# Altium PCB MX233.PcbDoc
Units mm, origin at the board's own origin, x right, y up, seen from the top; angles counter-clockwise.
Board outline 127 x 101.6 mm, 2 copper layers (Top Layer, Bottom Layer); 46 components, 118 nets, 386 pads, 39 vias.
Unrouted connection lines stored in the file: 56.
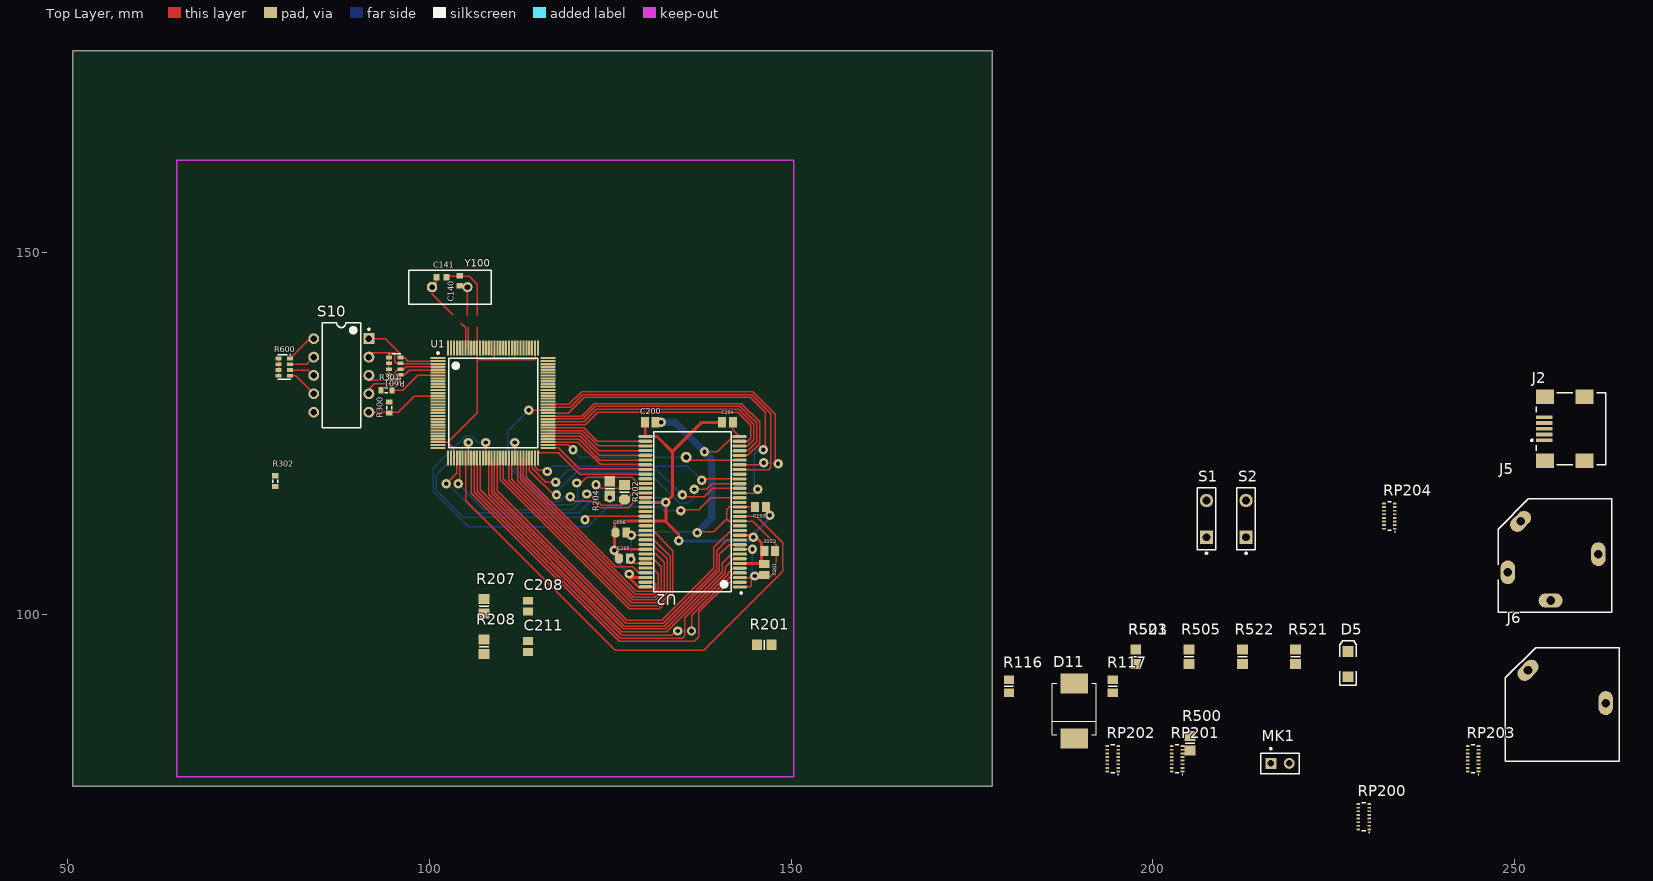
[diagram p0: Top Layer view]
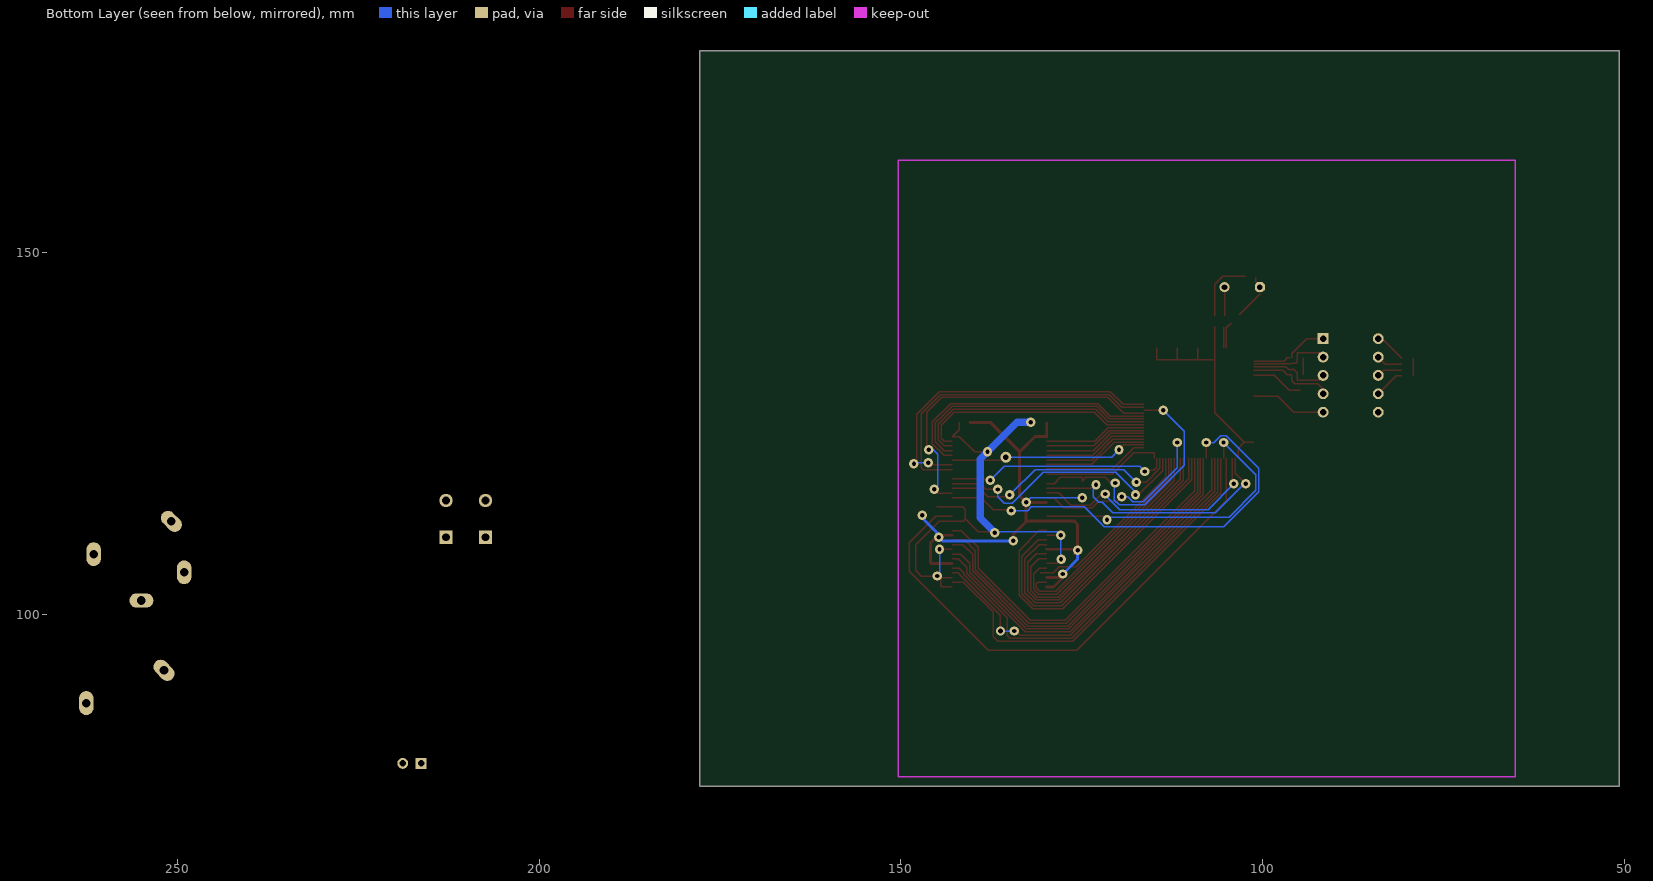
[diagram p1: Bottom Layer view, seen from below]

## Layer stack, top to bottom
Top Layer: signal copper 0.0356
Dielectric: dielectric 0.32, FR-4, Dk 4.8
Bottom Layer: signal copper 0.0356

## Board outline
50.8,76.2 177.8,76.2 177.8,177.8 50.8,177.8

## Design rules (kind name [scope] priority, off if disabled: settings)
Clearance Clearance_1 [(InComponentClass('All Components'))] p1: gap=0.1
Clearance [All] p2: gap=0.2
DiffPairsRouting [All] p1: maxlimit=0.254 minlimit=0.254 mostfreqgap=0.254 maxuncoupledlength=12.7
PolygonConnect [All] p1: connectstyle=Relief reliefconductorwidth=0.254 reliefentries=4 polygonreliefangle="90 Angle"
RoomDefinition MX233 [InComponentClass('MX233')] p1: confinementstyle=ConfineIn formatcopy=TRUE lockcomponents=FALSE outline 178.943,75.184 265.557,75.184 265.557,133.731 178.943,133.731
RoutingVias [All] p1: holewidth=0.6 width=1.3 viastyle="Through Hole" minholewidth=0.6 minwidth=1.3 maxholewidth=0.6 maxwidth=1.3
SilkscreenOverComponentPads [All] p1: minsilkscreentomaskgap=0.254
SolderMaskExpansion [All] p1: expansion=0.102
Width [All] p1: maxlimit=1 minlimit=0.2 preferedwidth=0.2
26 further rules are at their usual default settings.

## Classes and differential pairs
net class DDR_D1: EMI_D01 EMI_D08 EMI_D09 EMI_D10 EMI_D11 EMI_D12 EMI_D13 EMI_D14 EMI_D15 EMI_DQM1 EMI_DQS1
net class DDR_D0: EMI_D00 EMI_D02 EMI_D03 EMI_D04 EMI_D05 EMI_D06 EMI_D07 EMI_DQM0 EMI_DQS0
net class DDR_CTL: EMI_A00 EMI_A01 EMI_A02 EMI_A03 EMI_A04 EMI_A05 EMI_A06 EMI_A07 EMI_A08 EMI_A09 EMI_A10 EMI_A11 EMI_A12 EMI_BA0 EMI_BA1 EMI_CASN EMI_CE0N EMI_CKE EMI_RASN EMI_WEN
net class DDR_CK: DDR_CK_N DDR_CK_P
differential pair DDR_CK: +DDR_CK_P -DDR_CK_N

## Components (designator, comment, footprint, x,y, rotation, side; value= is the part's Value field where it differs from the comment)
C140 "10 pF, NP0" CAPC1608L 104.267,146.05 r90 top
C141 "10 pF, NP0" CAPC1608L 101.727,146.558 r0 top
C200 "10uF, 6.3V, X5R, 20%" CAPC2012L#1 130.556,126.492 r180 top
C201 "0.1uF, 10V, X5R" CAPC2012L#1 146.304,106.172 r90 top
C202 "0.1uF, 10V, X5R" CAPC2012L#1 147.066,108.712 r180 top
C203 "0.1uF, 10V, X5R" CAPC2012L#1 145.796,114.808 r0 top
C204 "0.1uF, 10V, X5R" CAPC2012L#1 141.224,126.492 r180 top
C205 "0.1uF, 10V, X5R" CAPC2012L#2 127,107.696 r180 top
C206 "0.1uF, 10V, X5R" CAPC2012L#2 126.492,111.252 r180 top
C208 "0.1uF, 10V, X5R" CAPC2012L#1 113.665,101.092 r90 top
C211 "0.1uF, 10V, X5R" CAPC2012L#1 113.665,95.504 r90 top
D5 "LED2" DSO-F2/D6.1 226.949,93.091 r90 top
D11 "MBR120VLSF" DIODE_SMC 189.103,86.614 r90 top
J2 "440119-2" 440247 261.874,125.603 r0 top
J5 "Phonejack3 RN 16 Ohm" JACK/6-V4A 255.524,108.077 r0 top
J6 "Video" JACK/6-V2 256.54,87.503 r0 top
MK1 "Mic1" PIN2 216.281,79.375 r0 top
R116 "0.39 ohm, 5%" RESC2012N 180.086,90.043 r90 top
R117 "0.1 ohm, 5%" RESC2012N 194.437,90.043 r90 top
R201 "47K, 5%" RESC2012M#1 146.304,95.758 r180 top
R202 "110 ohm, 1%" RESC2012M#2 127,116.84 r270 top
R204 "47K, 5%" RESC2012M#1 124.968,117.348 r270 top
R207 "1k, 1%" RESC2012M#1 107.569,101.092 r90 top
R208 "1k, 1%" RESC2012M#1 107.569,95.504 r90 top
R300 "47K, 5%" RESC1608L 94.488,128.524 r90 top
R301 "47K, 5%" RESC1608L 94.107,130.937 r0 top
R302 "47K, 5%" RESC1608L 78.74,118.364 r90 top
R500 "100k, 1%" RESC2012M#1 205.105,82.169 r90 top
R501 "10k, 1%" RESC2012M#1 197.612,94.107 r90 top
R505 "2.2K" RESC2012M#1 204.978,94.107 r90 top
R521 "47k, 1%" RESC2012M#1 219.71,94.107 r90 top
R522 "1.2k, 1%" RESC2012M#1 212.344,94.107 r90 top
R523 "1.2k, 1%" RESC2012M#1 197.612,94.107 r90 top
R600 "Res Pack_4SMD" EXB38V#1 80.01,134.112 r270 top
R601 "Res Pack_4SMD" EXB38V#2 95.25,134.239 r270 top
RP200 "22 ohm" EXB2HV 229.108,72.009 r90 top
RP201 "22 ohm" EXB2HV 203.327,80.01 r90 top
RP202 "22 ohm" EXB2HV 194.437,80.01 r90 top
RP203 "22 ohm" EXB2HV 244.221,80.01 r90 top
RP204 "22 ohm" EXB2HV 232.664,113.538 r90 top
S1 "SW-PB" SPST-2 207.391,113.157 r90 top
S2 "SW-PB" SPST-2 212.852,113.157 r90 top
S10 "SW DIP-5" DIP-10/D14.5 87.884,132.969 r180 top
U1 "MX233" TSQFP40P1600X1600-128M 108.839,129.159 r0 top
U2 "HY5DU121622DTP-J (or faster)" "TSOP65P1400-36M - duplicate" 136.398,109.22 r180 top
Y100 "24.0000 MHz (SaRonix-eCera F9 series, 30ppm, 8pF)" HC-49U 102.87,145.161 r0 top

## Footprints (in the part's own frame and the unit in brackets; to place one, negate y for a bottom-side part, rotate by r counter-clockwise, add the part's x,y. Pads: shape width x height; smd on the part's side, far side on the other; paste and mask are expansions set on the pad)
440247 [mm] "Connector; USB2.0, Type B, SM; 5 Position; Right Angle"
  rect 2.3x0.5 smd: 1(-7.85,-1.6) 2(-7.85,-0.8) 3(-7.85,0) 4(-7.85,0.8) 5(-7.85,1.6)
  rect 2.5x2 smd: 6(-7.75,4.45) 7(-2.25,4.45) 8(-7.75,-4.45) 9(-2.25,-4.45)
  round 0.6 hole 0.9 unplated: MH1(-5.25,2.2) MH2(-5.25,-2.2)
  silkscreen extent -9.67,-4.95 0.7,4.95
CAPC1608L [mm] "Chip Capacitor, Body 1.6x0.8mm, IPC High Density"
  rect 0.8x0.9 smd: 1(-0.7,0) 2(0.7,0)
  body extent -0.87,-0.48 0.87,0.48, height 1.3
CAPC2012L#1 [mm] "Chip Capacitor, Body 2.0x1.3mm, IPC High Density"
  rect 1.1x1.4 smd: 1(-0.75,0) 2(0.75,0)
  body extent -1.1,-0.72 1.1,0.72, height 1.4
CAPC2012L#2 [mm] "Chip Capacitor, Body 2.0x1.3mm, IPC High Density"
  rect 1.1x1.4 smd: 1(-0.75,0)
  oct 1.1x1.4 smd: 2(0.75,0)
  body extent -1.1,-0.72 1.1,0.72, height 1.4
DIODE_SMC [mil] "Magnetic-Core Inductor with Winding Polarity Marking; 2 Leads"
  rect 110x150 smd: 1(-150,0) 2(150,0)
  silkscreen extent -130,-120 150,120
DIP-10/D14.5 [mm] "DIP; 10 Leads; Row Spacing 7.62 mm; Pitch 2.54 mm"
  rect 1.5x1.5 hole 0.9: 1(-3.81,-5.08)
  round 1.5 hole 0.9: 2(-3.81,-2.54) 3(-3.81,0) 4(-3.81,2.54) 5(-3.81,5.08) 6(3.81,5.08) 7(3.81,2.54) 8(3.81,0) 9(3.81,-2.54) 10(3.81,-5.08)
  silkscreen extent -3.94,-7.25 2.65,7.25, body extent -3.25,-7.25 3.25,7.25, height 5.08
DSO-F2/D6.1 [mm] "SMT LED; 2 Flat Leads"
  rect 1.5x1.5 smd: 1(-1.75,0) 2(1.75,0)
  silkscreen extent -2.9,-1.15 3.2,1.15
EXB2HV [mm] "Chip Resistor Array, (0402x8); SM; 16 Leads; Body 3.90 x 1.70 mm (LxW max)"
  rect 0.25x0.5 smd: 1(-1.75,-0.75) 2(-1.25,-0.75) 3(-0.75,-0.75) 4(-0.25,-0.75) 5(0.25,-0.75) 6(0.75,-0.75) 7(1.25,-0.75) 8(1.75,-0.75) 9(1.75,0.75) 10(1.25,0.75) 11(0.75,0.75) 12(0.25,0.75) 13(-0.25,0.75) 14(-0.75,0.75) 15(-1.25,0.75) 16(-1.75,0.75)
  silkscreen extent -2.22,-0.8 1.95,0.25
EXB38V#1 [mm] "Chip Resistor Array, (0603x4); SM; 8 Leads; Body 3.40 x 1.75 mm (LxW max)"
  rect 0.5x0.8 smd: 1(-1.2,0.8) 2(-0.4,0.8) 3(0.4,0.8) 4(1.2,0.8) 5(1.2,-0.8) 6(0.4,-0.8) 7(-0.4,-0.8) 8(-1.2,-0.8)
  silkscreen extent -1.75,-0.87 1.7,0.87
EXB38V#2 [mm] "Chip Resistor Array, (0603x4); SM; 8 Leads; Body 3.40 x 1.75 mm (LxW max)"
  rect 0.5x0.8 smd: 1(-1.2,-0.8) 2(-0.4,-0.8) 3(0.4,-0.8) 4(1.2,-0.8) 5(1.2,0.8) 6(0.4,0.8) 7(-0.4,0.8) 8(-1.2,0.8)
  silkscreen extent -1.75,-0.87 1.7,0.87
HC-49U [mm] "Quartz Crystal, Thru-Hole; 2 Leads; Body 11.35 x 4.65 x 13.46 mm (LxWxH max)"
  oct 1.4x1.4 hole 0.8: 1(-2.44,0)
  round 1.4 hole 0.8: 2(2.44,0)
  silkscreen extent -5.7,-2.35 5.7,2.35
JACK/6-V2 [mm] "Connector; Jack Socket, 1/4\" [6.5mm], Thru-Hole, 2 Position, Vertical, Body 15.7 x 15.7 x 31 mm (WxTxH)"
  oval 2x3.3 hole 1.2: 1(6,0.2)
  oval 2x3.3 hole 1.2 rot 135: 5(-4.738,4.738)
  round 3.7 hole 4: MH1(0,0)
  silkscreen extent -7.85,-7.85 7.85,7.85
JACK/6-V4A [mm] "Connector; Jack Socket, 1/4\" [6.5mm], Thru-Hole, 4 Position, Vertical, Body 15.7 x 15.7 x 31 mm (WxTxH)"
  oval 2x3.3 hole 1.2: 1(6,0.2) 4(-6.5,-2.3)
  oval 3.3x2 hole 1.2: 3(-0.6,-6.2)
  oval 2x3.3 hole 1.2 rot 135: 5(-4.738,4.738)
  round 3.7 hole 4: MH1(0,0)
  silkscreen extent -7.85,-7.85 7.85,7.85
PIN2 [mm] "Photosensitive Diode; 2 Leads"
  rect 1.5x1.5 hole 0.9: 1(0,0)
  round 1.5 hole 0.9: 2(2.54,0)
  silkscreen extent -1.4,-1.4 3.94,2.17
RESC1608L [mm] "Chip Resistor, Body 1.6x0.8mm, IPC High Density"
  rect 0.7x0.9 smd: 1(-0.75,0) 2(0.75,0)
  silkscreen extent -0.2,-0.35 0.2,0.35, body extent -0.85,-0.48 0.85,0.48, height 0.9
RESC2012M#1 [mm] "Chip Resistor, Body 2.0x1.2mm, IPC Low Density"
  rect 1.4x1.5 smd: 1(-1,0) 2(1,0)
  silkscreen extent 0,-0.65 0,0.65, body extent -1.07,-0.7 1.07,0.7, height 0.7
RESC2012M#2 [mm] "Chip Resistor, Body 2.0x1.2mm, IPC Low Density"
  rect 1.4x1.5 smd: 1(-1,0)
  oct 1.4x1.5 smd: 2(1,0)
  silkscreen extent 0,-0.65 0,0.65, body extent -1.07,-0.7 1.07,0.7, height 0.7
RESC2012N [mm] "Chip Resistor, Body 2.0x1.2mm, IPC Medium Density"
  rect 1.2x1.4 smd: 1(-0.9,0) 2(0.9,0)
  silkscreen extent 0,-0.6 0,0.6, body extent -1.07,-0.7 1.07,0.7, height 0.7
SPST-2 [mm] "Circuit Breaker; 2 Leads"
  rect 1.85x1.85 hole 1.1: 1(-2.54,0)
  round 1.85 hole 1.1: 2(2.54,0)
  silkscreen extent -4.89,-1.27 4.28,1.27
"TSOP65P1400-36M - duplicate" [mm] "TSOP, 66-Leads, Body 12.2x12.6mm, Pitch 0.65mm, IPC Low Density"
  oval 1.95x0.45 smd: 1(-6.535,5.475) 2(-6.535,4.825) 3(-6.535,4.175) 4(-6.535,3.525) 5(-6.535,2.875) 6(-6.535,2.225) 7(-6.535,1.575) 8(-6.535,0.925) 9(-6.535,0.275) 10(-6.535,-0.375) 11(-6.535,-1.025) 12(-6.535,-1.675) 13(-6.535,-2.325) 14(-6.535,-2.975) 15(-6.535,-3.625) 16(-6.535,-4.275) 17(-6.535,-4.925) 18(-6.535,-5.575) 19(-6.51,-6.2) 20(-6.51,-6.85) 21(-6.51,-7.5) 22(-6.51,-8.15) 23(-6.51,-8.8) 24(-6.51,-9.45) 25(-6.51,-10.1) 26(-6.51,-10.75) 27(-6.51,-11.4) 28(-6.51,-12.05) 29(-6.51,-12.7) 30(-6.51,-13.35) 31(-6.51,-14) 32(-6.51,-14.65) 33(-6.51,-15.3) 34(6.53,-15.31) 35(6.525,-14.665) 36(6.525,-14.015) 37(6.525,-13.365) 38(6.525,-12.715) 39(6.525,-12.065) 40(6.525,-11.415) 41(6.525,-10.765) 42(6.525,-10.115) 43(6.525,-9.465) 44(6.525,-8.815) 45(6.525,-8.165) 46(6.525,-7.515) 47(6.525,-6.865) 48(6.525,-6.215) 49(6.5,-5.59) 50(6.5,-4.94) 51(6.5,-4.29) 52(6.5,-3.64) 53(6.5,-2.99) 54(6.5,-2.34) 55(6.5,-1.69) 56(6.5,-1.04) 57(6.5,-0.39) 58(6.5,0.26) 59(6.5,0.91) 60(6.5,1.56) 61(6.5,2.21) 62(6.5,2.86) 63(6.5,3.51) 64(6.5,4.16) 65(6.5,4.81) 66(6.5,5.46)
  silkscreen extent -6.85,-15.96 5.35,6.42, body extent -6.3,-16.04 6.32,6.1, height 1.27
TSQFP40P1600X1600-128M [mm] "Thin QFP, 128-Leads, Body 14x14mm, Pitch 0.4mm, IPC Low Density"
  oval 2.1x0.3 smd: 1(-7.6,6.2) 2(-7.6,5.8) 3(-7.6,5.4) 4(-7.6,5) 5(-7.6,4.6) 6(-7.6,4.2) 7(-7.6,3.8) 8(-7.6,3.4) 9(-7.6,3) 10(-7.6,2.6) 11(-7.6,2.2) 12(-7.6,1.8) 13(-7.6,1.4) 14(-7.6,1) 15(-7.6,0.6) 16(-7.6,0.2) 17(-7.6,-0.2) 18(-7.6,-0.6) 19(-7.6,-1) 20(-7.6,-1.4) 21(-7.6,-1.8) 22(-7.6,-2.2) 23(-7.6,-2.6) 24(-7.6,-3) 25(-7.6,-3.4) 26(-7.6,-3.8) 27(-7.6,-4.2) 28(-7.6,-4.6) 29(-7.6,-5) 30(-7.6,-5.4) 31(-7.6,-5.8) 32(-7.6,-6.2) 65(7.6,-6.2) 66(7.6,-5.8) 67(7.6,-5.4) 68(7.6,-5) 69(7.6,-4.6) 70(7.6,-4.2) 71(7.6,-3.8) 72(7.6,-3.4) 73(7.6,-3) 74(7.6,-2.6) 75(7.6,-2.2) 76(7.6,-1.8) 77(7.6,-1.4) 78(7.6,-1) 79(7.6,-0.6) 80(7.6,-0.2) 81(7.6,0.2) 82(7.6,0.6) 83(7.6,1) 84(7.6,1.4) 85(7.6,1.8) 86(7.6,2.2) 87(7.6,2.6) 88(7.6,3) 89(7.6,3.4) 90(7.6,3.8) 91(7.6,4.2) 92(7.6,4.6) 93(7.6,5) 94(7.6,5.4) 95(7.6,5.8) 96(7.6,6.2)
  oval 0.3x2.1 smd: 33(-6.2,-7.6) 34(-5.8,-7.6) 35(-5.4,-7.6) 36(-5,-7.6) 37(-4.6,-7.6) 38(-4.2,-7.6) 39(-3.8,-7.6) 40(-3.4,-7.6) 41(-3,-7.6) 42(-2.6,-7.6) 43(-2.2,-7.6) 44(-1.8,-7.6) 45(-1.4,-7.6) 46(-1,-7.6) 47(-0.6,-7.6) 48(-0.2,-7.6) 49(0.2,-7.6) 50(0.6,-7.6) 51(1,-7.6) 52(1.4,-7.6) 53(1.8,-7.6) 54(2.2,-7.6) 55(2.6,-7.6) 56(3,-7.6) 57(3.4,-7.6) 58(3.8,-7.6) 59(4.2,-7.6) 60(4.6,-7.6) 61(5,-7.6) 62(5.4,-7.6) 63(5.8,-7.6) 64(6.2,-7.6) 97(6.2,7.6) 98(5.8,7.6) 99(5.4,7.6) 100(5,7.6) 101(4.6,7.6) 102(4.2,7.6) 103(3.8,7.6) 104(3.4,7.6) 105(3,7.6) 106(2.6,7.6) 107(2.2,7.6) 108(1.8,7.6) 109(1.4,7.6) 110(1,7.6) 111(0.6,7.6) 112(0.2,7.6) 113(-0.2,7.6) 114(-0.6,7.6) 115(-1,7.6) 116(-1.4,7.6) 117(-1.8,7.6) 118(-2.2,7.6) 119(-2.6,7.6) 120(-3,7.6) 121(-3.4,7.6) 122(-3.8,7.6) 123(-4.2,7.6) 124(-4.6,7.6) 125(-5,7.6) 126(-5.4,7.6) 127(-5.8,7.6) 128(-6.2,7.6)
  silkscreen extent -7.72,-6.15 6.15,7.02, body extent -7,-7 7,7, height 1.6

## Part data
C140 C141: library part "CAP NP"
C200 C201 C202 C203 C204 C205 C206 C208 C211: library part "Cap Semi", "Capacitor (Semiconductor SIM Model)"
D5: "Typical RED, GREEN, YELLOW, AMBER GaAs LED"
D11: library part "Diode 1N5408", "3 Amp Medium Power Silicon Rectifier Diode"
J2: "USB 1.1, Right Angle, Thru-Hole, B Type, Receptacle, 4 Position, Black"
J5: library part "Phonejack3 RN", "Jack Socket, 1/4\" [6.5mm], Thru-Hole, Vertical, 3-Conductor with Tip open & Ring closed"
J6: library part Phonejack2, "Jack Socket, 1/4\" [6.5mm], Thru-Hole, Vertical, 2-Conductor Open Circuit"
MK1: "Microphone"
R116 R117: library part Res1, "Resistor"
R201 R204: library part R
R202 R207 R208 R500 R501 R505 R521 R522 R523: library part Res3, "Resistor"
R300 R301 R302: library part RESISTOR
R600 R601: "Isolated Resistor Network"
RP200 RP201 RP202 RP203 RP204: library part "RESISTOR DIP 8"
S1 S2: "Switch"
S10: "DIP Switch, 5 Position, SPST"
U1: library part i.MX233, "ARM i.MX233"
U2: library part HY5DU561622E(L)TP, "512 Mbit DDR SDRAM, x16"
Y100: library part XTAL, "Crystal Oscillator"

## Free pads (board coordinates)
  round 1.524 hole 0.762: 0(135.509,121.666)

## Via types
v1: diameter 1.3, hole 0.6, Top Layer to Bottom Layer, 38 vias
v2: diameter 1.27, hole 0.711, Top Layer to Bottom Layer, 1 vias

## Nets (pads, with @x,y where several pads share a name; then routed paths per layer and width w, separated by ;. In a path a pad name is that pad's centre, name@x,y a point inside that pad or via, vN(x,y) a via of type N, cw(c..) or ccw(c..) an arc to the next point about the centre after c; other vN are vias at no path point)
3V3: 
BATT_TEMP: C140.2 C141.2 C200.2 C201.2 C202.2 C203.2 C204.2 C205.2 C206.2 C211.2 J2.4 J6.5 MK1.2 R204.2 R208.1 R301.1 R302.1 R600.5 R600.6 R600.7 R600.8 U1.30 U1.35 U1.98 U1.105 U1.112 U1.118 U2.6 U2.12 U2.34 U2.48 U2.52 U2.58 U2.64 U2.66 | length 135.7
  Top Layer w0.2: R600.5 R600.6 R600.7 R600.8 ; U1.30 102.555,123.759 ; C141.2@102.427,146.685 105.537,146.685 106.68,145.542 106.68,141.224 ; U1.35 103.439,122.875 102.555,123.759 ; 106.639,139.659 U1.118 106.639,135.128 ; U1.112 109.039,135.128 ; U1.105 111.839,135.176 111.887,135.128 ; U1.98 114.639,135.17 114.597,135.128 111.887,135.128 ; R204.2@124.968,115.697 v1(124.968,116.078) R204.2 ; v1@125.857,108.96 125.857,108.585 C205.2@126.238,108.204 ; v1@127.635,105.06 v1(127.635,105.537) ; C200.2 C200.2@129.868,126.43 ; v1@144.502,110.895 v1(144.78,110.617) v1@144.907,110.744 ; v1@144.58,110.417 v1@145.361,110.417 ; C201.2@145.857,106.995 C201.2@145.923,107.061 ; 102.555,123.759 106.639,127.843 106.639,135.128 ; 106.639,135.128 109.039,135.128 ; 109.039,135.128 111.887,135.128
  Top Layer w0.4: v1@125.857,108.585 v1(125.603,108.839) 125.603,112.395 126.068,112.86 U2.52 132.707,112.86 ; v1@125.857,108.96 U2.58 ; C200.2@129.868,126.43 U2.34 131.502,124.53 133.604,122.428 ; U2.48 v1(132.707,115.435) ; U2.66 128.935,103.76 127.635,105.06 U2.64 ; v1(134.493,110.109) 134.493,110.998 132.707,112.784 v1(132.707,115.435) ; C204.2 137.668,126.492 133.604,122.428 ; U2.6 C201.2@145.857,106.995 ; U2.12 v1@144.502,110.895 ; v1@145.361,110.417 145.923,109.855 C201.2@145.923,107.061 ; v1(132.707,115.435) 133.604,116.332 133.604,122.428
  Bottom Layer w0.2: v1(124.968,116.078) 132.064,116.078 v1(132.707,115.435) ; v1(144.78,110.617) v1@144.78,110.998 ; v1@147.066,113.284 v1(147.066,113.665)
  Bottom Layer w0.4: v1(125.603,108.839) 125.603,107.569 v1(127.635,105.537) ; v1(134.493,110.109) 144.272,110.109 v1(144.78,110.617) ; v1@144.78,110.998 v1@147.066,113.284
DDR_CK_N: R202.2 U1.37 U2.46 | length 33.8
  Top Layer w0.2: v1(104.013,117.983) 104.239,117.983 U1.37 ; v1@122.047,116.84 123.825,115.062 126.555,115.062 128.229,116.735 U2.46
  Bottom Layer w0.2: v1(104.013,117.983) 107.569,114.427 119.761,114.427 v1@121.92,116.586 ; v1(121.793,116.586) v1@121.793,117.094
DDR_CK_P: R202.1 U1.36 U2.45 | length 36.6
  Top Layer w0.2: v1(102.362,117.983) 103.839,119.46 U1.36 ; v1@123.444,117.729 123.788,117.385 U2.45
  Bottom Layer w0.2: v1(102.362,117.983) 102.593,117.983 106.603,113.973 120.723,113.973 122.193,115.443 122.705,115.443 123.444,116.182 v1@123.444,117.944 ; v1(123.063,117.856) 123.063,118.11 v1@123.19,118.237
EMI_A00: U1.76 U2.29 | length 37.4
  Top Layer w0.2: U1.76 121.067,127.359 122.797,129.089 143.118,129.089 144.464,127.743 144.476,127.743 145.65,126.569 145.65,123.552 144.018,121.92 U2.29
EMI_A01: U1.75 U2.30 | length 35.9
  Top Layer w0.2: U1.75 121.232,126.959 122.962,128.689 142.952,128.689 144.298,127.343 144.31,127.343 145.25,126.403 145.25,123.802 144.018,122.57 U2.30
EMI_A02: U1.74 U2.31 | length 34.4
  Top Layer w0.2: U1.74 121.398,126.559 123.128,128.289 142.787,128.289 144.85,126.226 144.85,124.052 144.018,123.22 U2.31
EMI_A03: U1.73 U2.32 | length 33
  Top Layer w0.2: U1.73 121.564,126.159 123.294,127.889 142.621,127.889 144.45,126.06 144.45,124.302 144.018,123.87 U2.32
EMI_A04: U1.72 U2.35 | length 14.2
  Top Layer w0.2: U1.72 121.383,125.759 123.257,123.885 U2.35
EMI_A05: U1.71 U2.36 | length 14.3
  Top Layer w0.2: U1.71 121.217,125.359 123.341,123.235 U2.36
EMI_A06: U1.70 U2.37 | length 14.4
  Top Layer w0.2: U1.70 121.052,124.959 123.426,122.585 U2.37
EMI_A07: U1.69 U2.38 | length 14.5
  Top Layer w0.2: U1.69 120.886,124.559 123.51,121.935 U2.38
EMI_A08: U1.68 U2.39 | length 14.6
  Top Layer w0.2: U1.68 120.72,124.159 123.594,121.285 U2.39
EMI_A09: U1.67 U2.40 | length 14.7
  Top Layer w0.2: U1.67 120.555,123.759 123.645,120.669 129.839,120.669 U2.40
EMI_A10: pad.0 U1.66 U2.28 | length 27.3
  Top Layer w0.2: U1.66 119.211,123.359 v1(119.888,122.682) ; pad.0 135.905,121.27 U2.28
  Bottom Layer w0.2: v1(119.888,122.682) 120.904,121.666 pad.0
EMI_A11: U1.65 U2.41 | length 14.7
  Top Layer w0.2: U1.65 117.871,122.959 120.777,120.053 129.805,120.053 U2.41
EMI_A12: U1.64 U2.42 | length 16.8
  Top Layer w0.2: U1.64 115.039,122.278 115.062,122.301 117.856,122.301 120.822,119.335 U2.42
EMI_BA0: U1.79 U2.26 | length 44.4
  Top Layer w0.2: U1.79 119.484,128.559 121.246,130.321 144.565,130.321 147.193,127.693 147.193,120.269 146.894,119.97 U2.26
EMI_BA1: U1.80 U2.27 | length 46.1
  Top Layer w0.2: U1.80 119.319,128.959 121.081,130.721 144.73,130.721 147.828,127.623 v1@147.828,120.904 ; U2.27 v1@146.243,120.62 ; v1@146.304,120.777 146.243,120.838 v1(146.243,120.92) 146.258,120.92 v1@146.558,120.62
  Bottom Layer w0.2: v1(146.243,120.92) 148.066,120.92 v1(148.209,120.777)
EMI_CASN: U1.62 U2.22 | length 35.2
  Top Layer w0.2: U1.62 114.239,120.145 116.147,118.237 v1(117.475,118.237) v1@117.983,118.237 ; v1(135.001,116.459) 135.255,115.951 135.509,116.205 138.049,116.205 139.214,117.37 U2.22
  Bottom Layer w0.2: v1(117.475,118.237) 119.211,119.973 131.487,119.973 134.62,116.84 134.62,116.078 v1(135.001,116.459)
EMI_CE0N: R201.2 U1.63 U2.24 | length 31.9
  Top Layer w0.2: U1.63 114.639,120.311 115.062,119.888 116.205,119.888 116.325,119.768 v1(116.325,119.695) ; v1@137.287,118.364 137.287,118.11 137.414,117.983 138.101,118.67 U2.24
  Bottom Layer w0.2: v1(116.325,119.695) 117.026,120.396 135.763,120.396 v1(137.668,118.491)
EMI_CKE: R204.1 U1.78 U2.44 | length 38.7
  Top Layer w0.2: v1(113.792,128.159) U1.78 ; v1(120.396,118.11) 121.031,118.11 121.793,118.872 124.444,118.872 R204.1 124.968,118.872 128.016,118.872 128.853,118.035 U2.44
  Bottom Layer w0.2: v1(113.792,128.159) 110.889,125.256 110.889,120.574 116.354,115.109 119.877,115.109 120.523,115.755 v1@120.523,118.11 ; v1(120.396,118.11) v1@120.523,118.11 ; v1@120.523,118.11 120.523,118.618 121.031,118.11 v1@120.523,118.11
EMI_D00: U1.41 U2.2 | length 55.8
  Top Layer w0.2: U1.41 105.839,116.665 126.276,96.228 136.614,96.228 137.287,96.901 137.287,100.307 141.375,104.395 U2.2
EMI_D01: U1.43 U2.4 | length 54.3
  Top Layer w0.2: U1.43 106.639,116.996 126.588,97.047 133.496,97.047 133.985,97.536 134.239,97.536 v1(134.366,97.663) v1@134.62,97.663 ; v2(136.271,97.663) 136.271,99.857 141.719,105.305 141.719,105.328 142.086,105.695 U2.4
  Bottom Layer w0.2: v1(134.366,97.663) v2(136.271,97.663)
EMI_D02: U1.42 U2.5 | length 55.4
  Top Layer w0.2: U1.42 106.239,116.831 126.423,96.647 135.001,96.647 135.336,96.982 135.336,99.488 141.319,105.471 141.319,105.736 141.928,106.345 U2.5
EMI_D03: U1.44 U2.7 | length 53.1
  Top Layer w0.2: U1.44 107.039,117.162 126.652,97.549 132.832,97.549 140.919,105.636 140.919,106.502 142.062,107.645 U2.7
EMI_D04: U1.47 U2.8 | length 52.4
  Top Layer w0.2: U1.47 108.239,116.528 126.818,97.949 132.666,97.949 140.519,105.802 140.519,107.049 141.765,108.295 U2.8
EMI_D05: U1.48 U2.10 | length 52.7
  Top Layer w0.2: U1.48 108.639,116.693 126.983,98.349 132.5,98.349 140.119,105.968 140.119,108.242 141.472,109.595 U2.10
EMI_D06: U1.49 U2.11 | length 52.4
  Top Layer w0.2: U1.49 109.039,116.859 127.149,98.749 132.335,98.749 139.719,106.133 139.719,108.731 141.224,110.236 141.791,110.236 141.8,110.245 U2.11
EMI_D07: U1.50 U2.13 | length 52.3
  Top Layer w0.2: U1.50 109.439,117.025 127.315,99.149 132.169,99.149 139.319,106.299 139.319,109.208 141.656,111.545 U2.13
EMI_D08: U1.51 U2.54 | length 46.1
  Top Layer w0.2: U1.51 109.839,118.554 127.644,100.749 131.806,100.749 133.693,102.636 133.693,108.75 130.883,111.56 U2.54
EMI_D09: U1.52 U2.56 | length 43.4
  Top Layer w0.2: U1.52 110.239,118.719 127.809,101.149 131.641,101.149 133.293,102.801 133.293,108.007 131.04,110.26 U2.56
EMI_D10: U1.54 U2.57 | length 41
  Top Layer w0.2: U1.54 111.039,118.485 127.975,101.549 131.475,101.549 132.893,102.967 132.893,107.645 130.928,109.61 U2.57
EMI_D11: U1.55 U2.59 | length 38.5
  Top Layer w0.2: U1.55 111.439,118.651 128.141,101.949 131.309,101.949 132.493,103.133 132.493,107.156 131.339,108.31 U2.59
EMI_D12: U1.57 U2.60 | length 35.9
  Top Layer w0.2: U1.57 112.239,118.416 128.306,102.349 131.144,102.349 132.093,103.298 132.093,106.54 130.973,107.66 U2.60
EMI_D13: U1.58 U2.62 | length 33.1
  Top Layer w0.2: U1.58 112.639,118.582 128.472,102.749 130.978,102.749 131.693,103.464 131.693,105.543 130.876,106.36 U2.62
EMI_D14: U1.60 U2.63 | length 25.3
  Top Layer w0.2: U1.60 113.439,118.913 118.081,114.271 ; 118.145,114.208 125.799,106.553 128.143,106.553 128.986,105.71 U2.63 U2.63@130.764,105.71
EMI_D15: U1.59 U2.65 | length 29.8
  Top Layer w0.2: U1.59 113.039,118.748 128.638,103.149 130.812,103.149 131.293,103.63 131.293,104.165 131.048,104.41 U2.65
EMI_DQM0: U1.46 U2.20 | length 61.6
  Top Layer w0.2: U1.46 v1(107.839,123.698) ; v1@134.747,114.427 v1(134.747,114.3) 134.747,114.173 135.001,114.427 137.287,114.427 138.93,116.07 U2.20
  Bottom Layer w0.2: v1(107.839,123.698) 106.783,123.698 105.833,124.648 105.045,124.648 100.565,120.168 100.565,116.928 105.413,112.08 121.933,112.08 124.661,114.808 131.991,114.808 132.499,114.3 v1(134.747,114.3)
EMI_DQM1: U1.56 U2.47 | length 27.1
  Top Layer w0.2: U1.56 v1(111.839,123.698) ; v1(119.507,116.205) 120.142,115.57 122.704,115.57 123.612,114.662 126.721,114.662 126.74,114.681 127.508,114.681 128.912,116.085 U2.47
  Bottom Layer w0.2: v1(111.839,123.698) 111.839,120.19 116.52,115.509 117.996,115.509 118.692,116.205 v1(119.507,116.205)
EMI_DQS0: U1.39 U2.16 | length 74.1
  Top Layer w0.2: U1.39 105.039,115.687 125.73,94.996 137.922,94.996 148.844,105.918 148.844,109.855 145.204,113.495 U2.16
EMI_DQS1: U1.40 U2.51 | length 43
  Top Layer w0.2: U1.40 v1(105.439,123.698) ; v1(121.539,113.03) 121.158,113.411 v1@121.666,113.411 ; v1@121.567,113.51 U2.51
  Bottom Layer w0.2: v1(105.439,123.698) 100.965,119.224 100.965,117.094 104.648,113.411 121.92,113.411 v1(121.539,113.03)
EMI_RASN: U1.61 U2.23 | length 37.4
  Top Layer w0.2: U1.61 113.839,119.82 v1@117.401,116.258 ; v1@136.652,116.713 137.16,117.221 138.303,117.221 139.102,118.02 U2.23
  Bottom Layer w0.2: v1@117.602,116.385 117.602,116.84 120.335,119.573 130.363,119.573 134.62,115.316 135.763,115.316 136.652,116.205 v1(136.652,117.221)
  other v1: 117.602,116.459
EMI_WEN: U1.77 U2.21 | length 47.5
  Top Layer w0.2: U1.77 119.25,127.759 121.412,129.921 144.399,129.921 146.431,127.889 146.431,122.301 v1(146.177,122.682) ; U2.21 145.41,116.72 v1(145.41,117.226) v1@145.288,117.348
  Bottom Layer w0.2: v1(145.41,117.226) 144.907,117.729 144.907,122.047 145.542,122.682 v1(146.177,122.682)
GND_POWER: 
HP_VGND: J5.5 U1.111
I2C_SCL: R523.1 U1.127
I2C_SDA: R522.1 U1.128
LCD_D00_I: R601.8 S10.1 U1.2 | length 11
  Top Layer w0.2: S10.1@91.567,138.049 93.98,138.049 96.05,135.979 R601.8 ; R601.8@96.247,135.382 96.647,135.382 97.07,134.959 U1.2
LCD_D01_I: R601.7 S10.2 U1.3 | length 11.4
  Top Layer w0.2: S10.2 91.694,135.998 91.821,136.125 95.25,136.125 95.25,134.874 95.485,134.639 R601.7 ; R601.7@96.05,134.559 U1.3
LCD_D02_I: R601.6 S10.3 U1.4 | length 11.1
  Top Layer w0.2: S10.3@91.567,132.334 95.25,132.334 95.25,133.35 95.739,133.839 R601.6 ; R601.6@96.05,133.731 96.393,133.731 96.821,134.159 U1.4
LCD_D03_I: R601.5 S10.4 U1.5 | length 11.8
  Top Layer w0.2: S10.4@91.567,130.429 91.567,130.937 92.456,131.826 95.631,131.826 96.05,132.245 R601.5 96.107,133.096 96.647,133.096 97.26,133.709 101.189,133.709 U1.5
LCD_D04_I: U1.6
LCD_D05_I: R301.2 U1.7 | length 7.2
  Top Layer w0.2: R301.2 96.393,130.937 98.415,132.959 U1.7
LCD_D06_I: U1.8
LCD_D07_I: U1.9
LCD_D08_I: U1.22
LCD_D09_I: U1.23
LCD_D10_I: U1.24
LCD_D11_I: U1.25
LCD_D12_I: U1.27
LCD_D13_I: U1.26
LCD_D14_I: U1.29
LCD_D15_I: U1.28
LCD_D16: U1.19
LCD_D17: U1.20
LCD_DOTCK: U1.17
LCD_HSYNC: U1.15
LCD_RS_I: R300.1 S10.5 U1.14 | length 10.5
  Top Layer w0.2: S10.5 95.758,127.889 97.978,130.109 101.189,130.109 U1.14
LCD_VSYNC: U1.16
MEM_VREF: C208.2 C211.1 R207.1 R208.2 U2.49
NetC112_2: D11.2 R116.1 U1.101
NetC117_2: R116.2
NetC121_2: R117.2
NetC130_2: U1.117
NetC131_1: R505.1 U1.107
NetC140_1: C140.1 U1.121 Y100.2 | length 6.8
  Top Layer w0.2: 105.31,141.224 Y100.2 ; U1.121 105.439,139.602
NetC141_1: C141.1 U1.122 Y100.1 | length 10.3
  Top Layer w0.2: C141.1 101.027,145.758 Y100.1 100.43,144.172 103.251,141.351 ; 104.394,140.208 105.039,139.563 U1.122
NetC506_2: J6.1 U1.104
NetJ5_1: J5.1 U1.109
NetJ5_3: J5.3 U1.113
NetJ5_4: J5.4 R501.1
NetL100_1: U1.99
NetL100_2: U1.97
NetMK1_1: MK1.1 R505.2 U1.116
NetP104_2: U1.126
NetP104_3: U1.125
NetR112_1: U1.89
NetR302_2: R302.2 S10.6
NetR500_2: R500.2 U1.108
NetR521_1: R521.1
NetR600_1: R600.1 S10.10 | length 4.4
  Top Layer w0.2: R600.1 83.547,138.049 S10.10
NetR600_2: R600.2 S10.9 | length 3.7
  Top Layer w0.2: R600.2 83.077,134.512 S10.9
NetR600_3: R600.3 S10.8 | length 3.6
  Top Layer w0.2: R600.3 83.331,133.712 S10.8
NetR600_4: R600.4 S10.7 | length 4.3
  Top Layer w0.2: R600.4 81.591,132.912 S10.7
NetR604_2: S2.1
NetR605_2: S1.1
P2.5V: C200.1 C201.1 C202.1 C203.1 C204.1 C205.1 C206.1 C208.1 R201.1 R207.2 U1.38 U1.45 U1.53 U1.106 U2.1 U2.3 U2.9 U2.15 U2.18 U2.33 U2.55 U2.61 | length 80.6
  Top Layer w0.2: C205.1@127.889,107.823 v1(127.889,107.569) 128.448,107.01 U2.61 ; v1(127.928,110.91) U2.55 ; v1(137.033,111.252) 137.16,111.379 139.319,111.379 141.097,113.157 ; v1(138.049,122.428) 139.827,122.428 141.919,124.52 U2.33 141.974,125.454 C204.1 ; U2.1 144.366,103.745 144.507,103.886 144.507,105.045 U2.3 ; U2.9 v1(144.674,108.945) ; v1(144.97,105.257) 147.167,105.257 147.955,106.045 147.955,109.601 144.711,112.845 U2.15 141.409,112.845 141.097,113.157 ; C203.1 142.946,114.808 U2.18 141.465,114.795 141.097,114.427 141.097,113.157
  Bottom Layer w0.2: v1(127.889,107.569) 127.928,107.608 v1(127.928,110.91) 128.397,111.379 v1@137.16,111.379 ; v1(144.674,108.945) 144.674,105.552 v1(144.97,105.257)
  Bottom Layer w1: v1(132.08,126.492) 133.985,126.492 v1(138.049,122.428) 139.065,121.412 139.065,113.284 v1@137.16,111.379
P3.3V: R300.2 R500.1 R501.2 R521.2 R522.2 R523.2 R601.1 R601.2 R601.3 R601.4 S2.2 U1.18 U1.92 U1.95 | length 2.4
  Top Layer w0.2: R601.4 R601.3 R601.2 R601.1
POWER: S1.2
PSWITCH: U1.119
SSP1_CMD: U1.83
SSP1_DATA0: U1.84
SSP1_DATA1: U1.85
SSP1_DATA2: U1.86
SSP1_DATA3: U1.87
SSP1_SCK: U1.90
USB_D_N: J2.2 U1.123
USB_D_P: J2.3 U1.124
VDD_5V: J2.1 U1.102
VDD_BATT: D11.1 R117.1 U1.100 U1.103
VDDA: U1.96 U1.110
VDDD: U1.1 U1.93 U1.94
VDDXTAL: U1.120
"X_LEFT -": 
"X_RIGHT +": 
"Y_LOW -": 
"Y_UP +": 
pads on no net: D5.1 D5.2 J2.5 J2.6 J2.7 J2.8 J2.9 J2.MH1 J2.MH2 J5.MH1 J6.MH1 RP200.1 RP200.2 RP200.3 RP200.4 RP200.5 RP200.6 RP200.7 RP200.8 RP200.9 RP200.10 RP200.11 RP200.12 RP200.13 RP200.14 RP200.15 RP200.16 RP201.1 RP201.2 RP201.3 RP201.4 RP201.5 RP201.6 RP201.7 RP201.8 RP201.9 RP201.10 RP201.11 RP201.12 RP201.13 RP201.14 RP201.15 RP201.16 RP202.1 RP202.2 RP202.3 RP202.4 RP202.5 RP202.6 RP202.7 RP202.8 RP202.9 RP202.10 RP202.11 RP202.12 RP202.13 RP202.14 RP202.15 RP202.16 RP203.1 RP203.2 RP203.3 RP203.4 RP203.5 RP203.6 RP203.7 RP203.8 RP203.9 RP203.10 RP203.11 RP203.12 RP203.13 RP203.14 RP203.15 RP203.16 RP204.1 RP204.2 RP204.3 RP204.4 RP204.5 RP204.6 RP204.7 RP204.8 RP204.9 RP204.10 RP204.11 RP204.12 RP204.13 RP204.14 RP204.15 RP204.16 U1.10 U1.11 U1.12 U1.13 U1.21 U1.31 U1.32 U1.33 U1.34 U1.81 U1.82 U1.88 U1.91 U1.114 U1.115 U2.14 U2.17 U2.19 U2.25 U2.43 U2.50 U2.53

## Keep-outs
Keep-Out Layer:
  lines w0.2: 65.151,77.5 65.151,162.687 150.368,162.687 150.368,77.5 65.151,77.5

## Silkscreen, mask and mechanical layers (free items; w line width, h text height)
Mechanical 1:
  text "ADAT" at 131.191,123.825 h0.2
  text "ADAT" at 140.843,123.698 h0.2
  text "ADAT" at 131.191,123.19 h0.2
  text "ADAT" at 140.843,123.063 h0.2
  text "ADAT" at 131.191,122.555 h0.2
  text "ADAT" at 140.843,122.428 h0.2
  text "ADAT" at 131.191,121.793 h0.2
  text "ADAT" at 140.843,121.793 h0.2
  text "ADAT" at 131.191,121.158 h0.2
  text "ADAT" at 140.843,121.158 h0.2
  text "ADAT" at 131.191,120.523 h0.2
  text "ADAT" at 131.191,119.888 h0.2
  text "ADAT" at 131.191,119.38 h0.2
  text "DATA7" at 144.145,111.506 h0.2
  text "DATA8" at 127.762,111.379 h0.2
  text "DATA" at 127.889,110.109 h0.2
  text "DATA" at 144.145,110.109 h0.2
  text "DATA" at 127.889,109.474 h0.2
  text "DATA" at 144.145,109.474 h0.2
  text "DATA" at 127.889,108.204 h0.2
  text "DATA" at 144.272,108.204 h0.2
  text "DATA" at 127.889,107.569 h0.2
  text "DATA" at 144.272,107.569 h0.2
  text "DATA" at 128.016,106.299 h0.2
  text "DATA" at 144.145,106.172 h0.2
  text "DATA" at 144.145,105.537 h0.2
  text "DATA" at 128.016,105.41 h0.2
  text "DATA" at 128.016,104.267 h0.2
  text "DATA0" at 144.145,104.267 h0.2
Drill Drawing:
  text ".LEGEND" at 182.88,81.28 h1.52
  text "Drill Drawing." at 182.88,78.74 h1.52

## Dimensions
65.151,77.5 to 65.151,162.687 on Mechanical 1
65.151,77.5 to 150.368,77.5 on Mechanical 1

## Text inside footprints (layer, text, board x,y; h text height)
J2: Mechanical 1 "PCB Edge" at 262.306,121.567 h0.25 r90
J5: Mechanical 1 "Alert PCB fab to slot details" at 247.624,117.737 h0.3; Mechanical 1 "Slot 1.2x2.5mm, PTH" at 247.624,117.237 h0.3; Mechanical 1 "Assign keep-out area to slot" at 247.624,118.237 h0.3; Mechanical 1 "Mech 1 - Slot cut-out" at 247.624,116.737 h0.3; Mechanical 1 "Mech 2 - Clearance, move to internal plane if present" at 247.624,116.237 h0.3
J6: Mechanical 1 "Alert PCB fab to slot details" at 248.64,97.163 h0.3; Mechanical 1 "Slot 1.2x2.5mm, PTH" at 248.64,96.663 h0.3; Mechanical 1 "Assign keep-out area to slot" at 248.64,97.663 h0.3; Mechanical 1 "Mech 1 - Slot cut-out" at 248.64,96.163 h0.3; Mechanical 1 "Mech 2 - Clearance, move to internal plane if present" at 248.64,95.663 h0.3